# Altium PCB PCB.PcbDoc
Units mm, origin at the board's own origin, x right, y up, seen from the top; angles counter-clockwise.
Board outline 39.7 x 41.65 mm, 2 copper layers (Top Layer, Bottom Layer); 15 components, 9 nets, 36 pads, 146 vias.
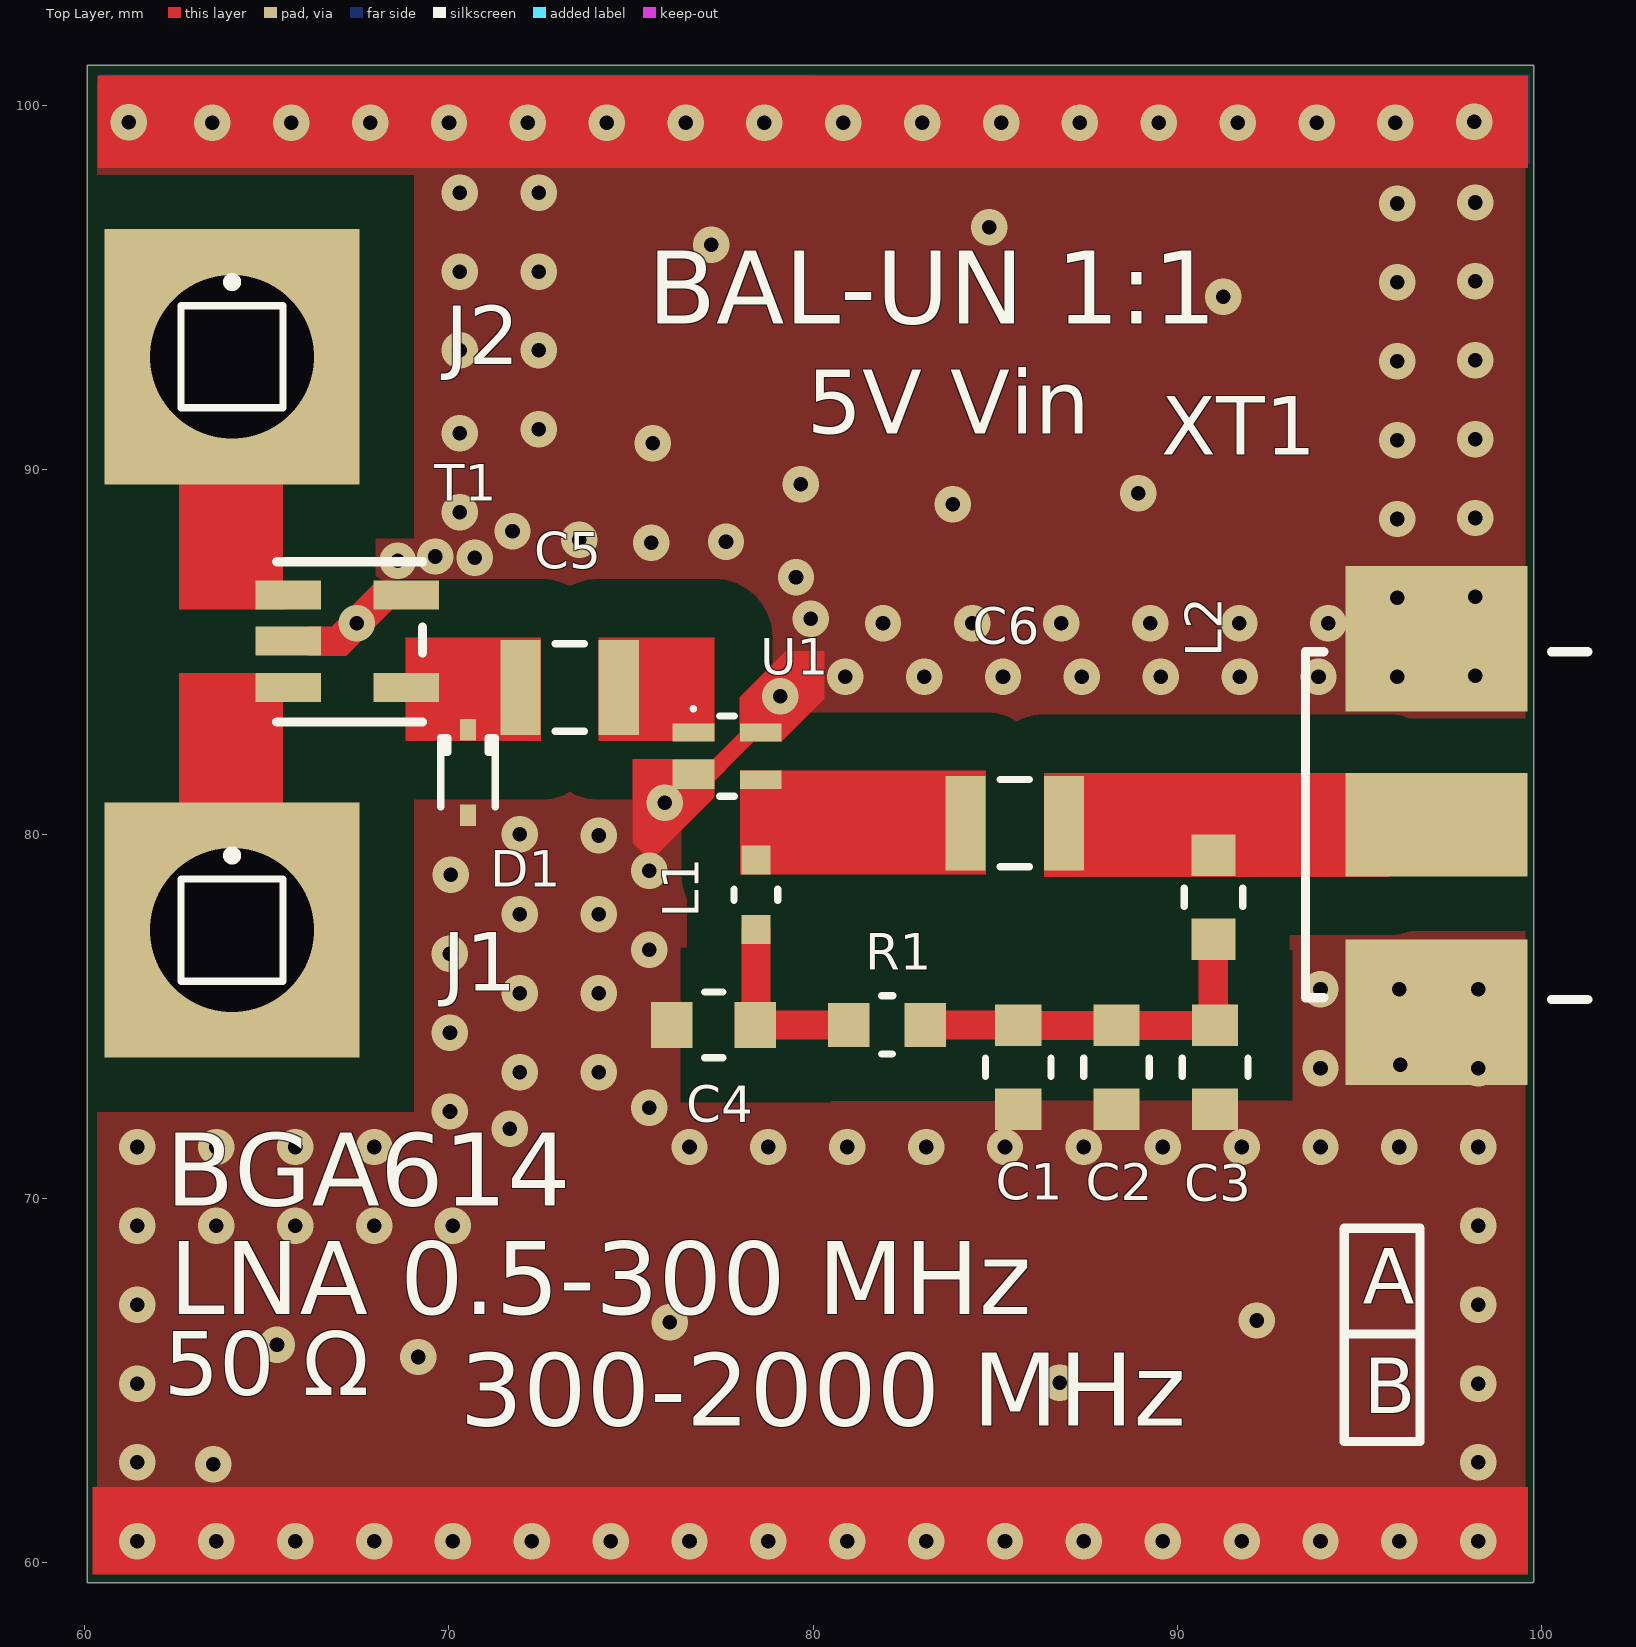
[diagram p0: Top Layer view]
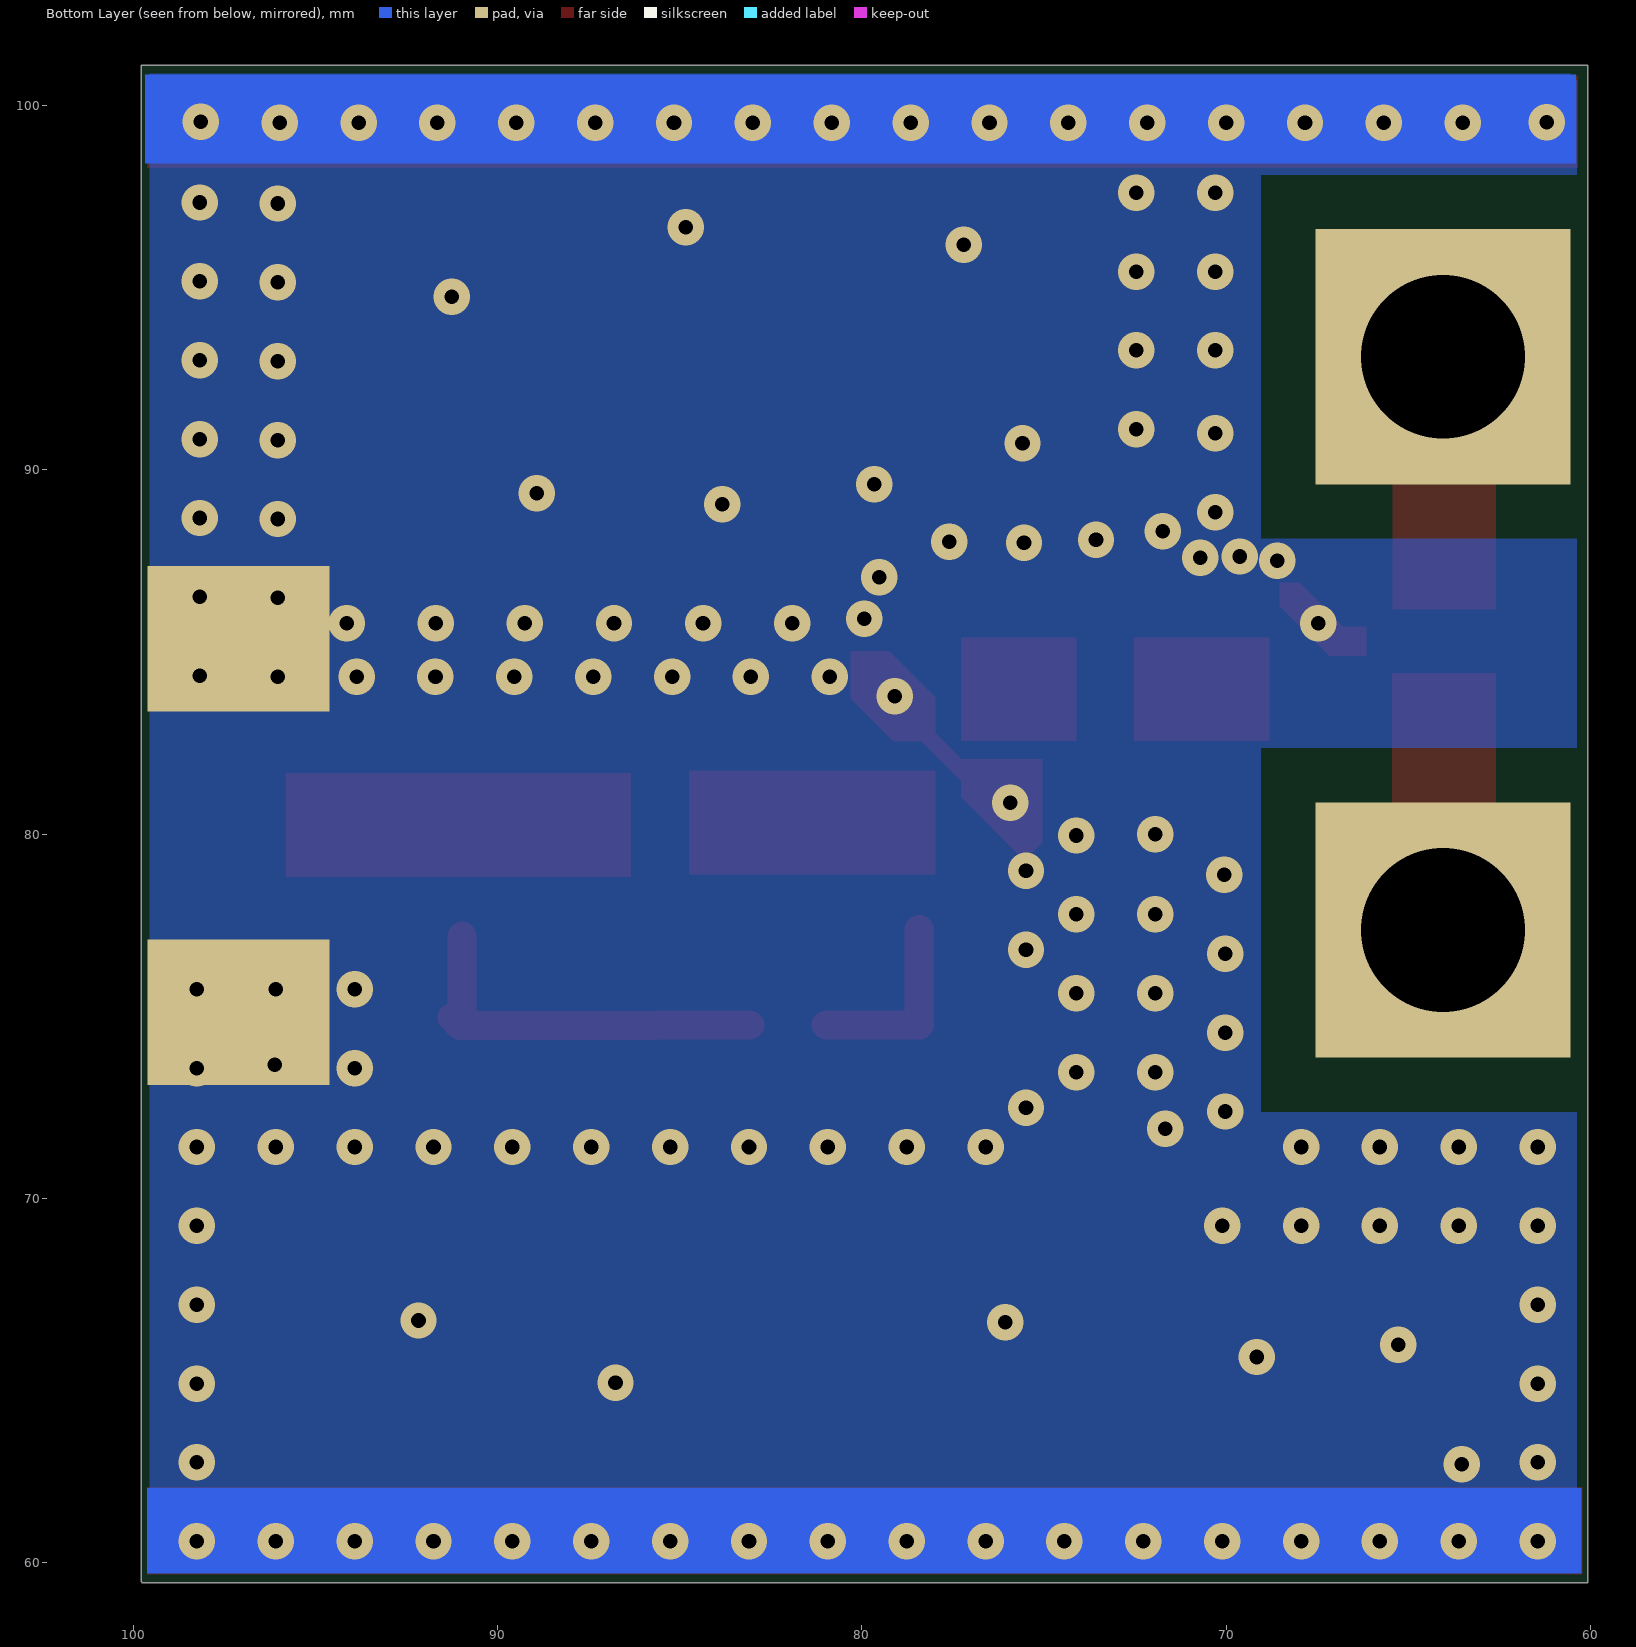
[diagram p1: Bottom Layer view, seen from below]
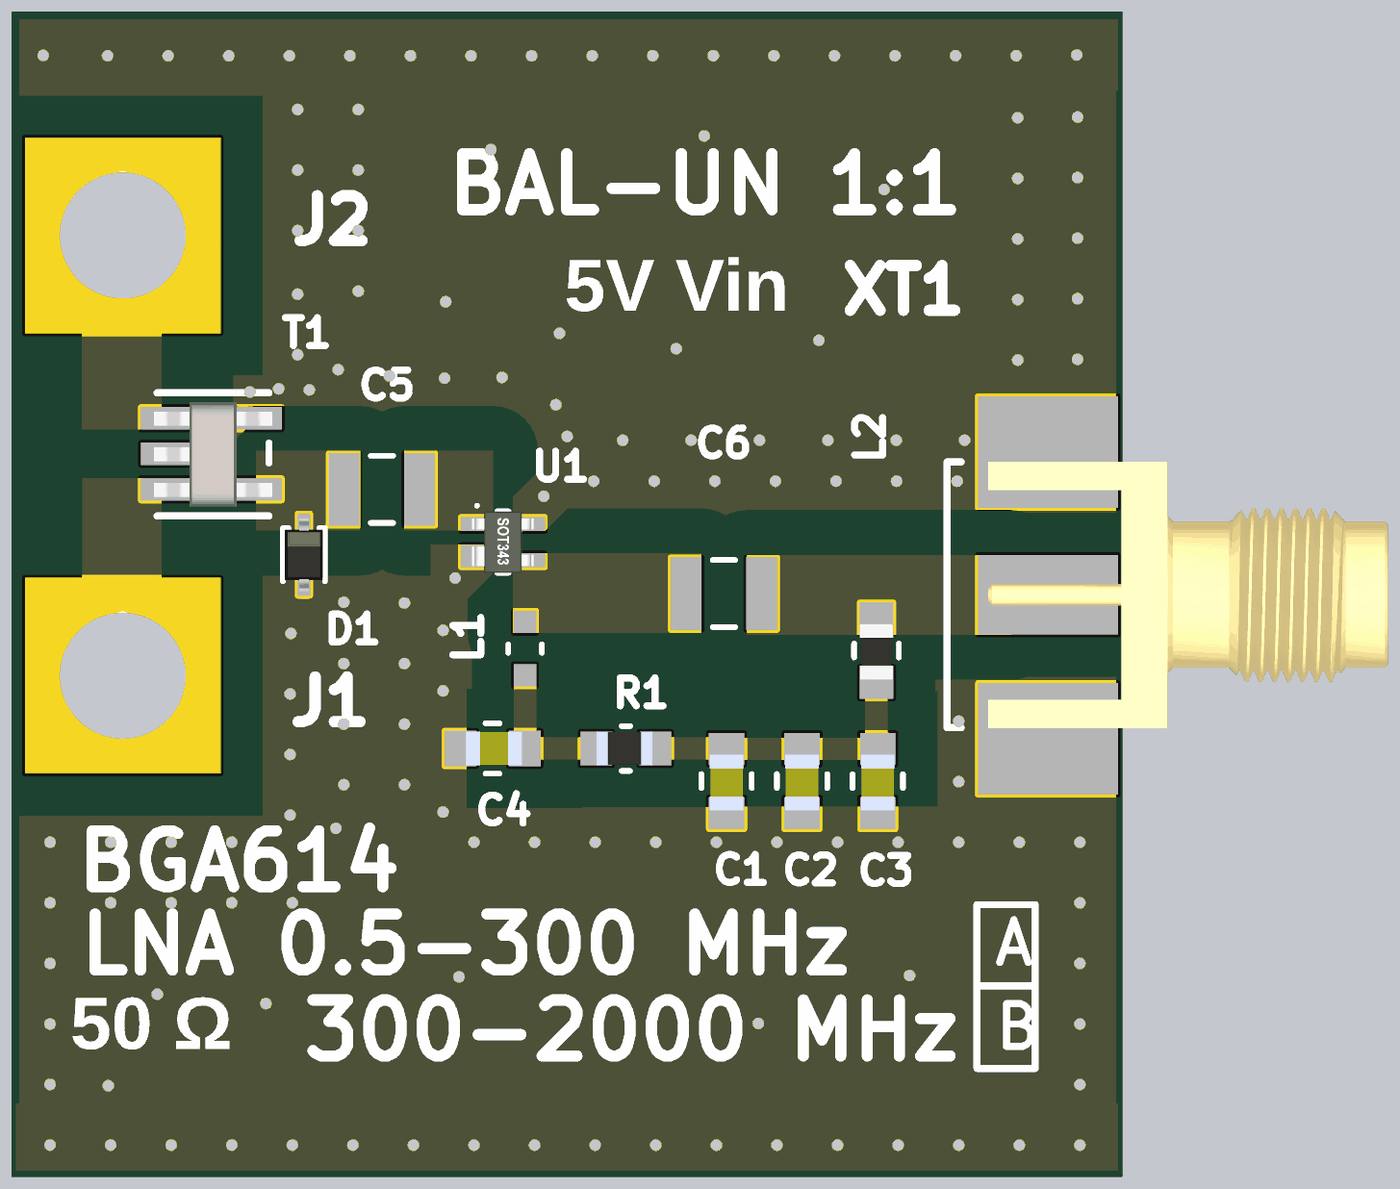
[diagram p2: 3D render of the assembled board from above, using the file's embedded part models]

## Layer stack, top to bottom
Top Solder: solder mask 0.0102, Solder Resist, Dk 3.5
Top Layer: signal copper 0.0356
Dielectric 1: dielectric 0.32, FR-4, Dk 4.8
Bottom Layer: signal copper 0.0356
Bottom Solder: solder mask 0.0102, Solder Resist, Dk 3.5

## Board outline
60.075,101.1 60.075,59.45 99.75,59.45 99.775,59.475 99.775,101.1

## Design rules (kind name [scope] priority, off if disabled: settings)
Clearance [All] p1: gap=0.4 ignorepadtopadclearanceinfootprint=TRUE except(1.5: SMDPad-Fill SMDPad-Poly SMDPad-Region THPad-Fill THPad-Poly THPad-Region; 1.6: Fill-Fill Fill-Poly Fill-Region Poly-Poly Poly-Region Region-Region)
PlaneConnect [All] p1: planeconnectstyle=Direct reliefexpansion=0.508 reliefentries=4 reliefconductorwidth=0.254 reliefairgap=0.254
PolygonConnect [All] p1: connectstyle=Direct reliefconductorwidth=0.254 reliefentries=4 polygonreliefangle="90 Angle" airgapwidth=0.254
RoomDefinition lna-balun [InComponentClass('lna-balun')] p1 off: confinementstyle=ConfineIn formatcopy=TRUE lockcomponents=FALSE outline 55.87,28.954 133.975,28.954 133.975,47.75 55.87,47.75
RoutingVias [All] p1: holewidth=0.4 width=1 viastyle="Through Hole" minholewidth=0.4 minwidth=1 maxholewidth=0.4 maxwidth=1
SolderMaskExpansion [All] p1: expansion=0.102
Width [All] p1: maxlimit=3 minlimit=0.4 preferedwidth=0.8 impedancedriven=TRUE minimp=50.000000 maximp=50.000000 favimp=50.000000
29 further rules are at their usual default settings.

## Components (designator, comment, footprint, x,y, rotation, side; value= is the part's Value field where it differs from the comment)
C1 "CAP_NPOL" C0805 88.326,74.549 r270 top value=100pF
C2 "CAP_NPOL" C0805 85.629,74.549 r270 top value=1nF
C3 "CAP_NPOL" C0805 91.031,74.547 r270 top value=10nF
C4 "CAP_NPOL" C0805 76.315,74.761 r0 top value=NC
C5 "CAP_NPOL" C1210 73.312,84.024 r0 top value=1nF
C6 "CAP_NPOL" C1210 85.534,80.299 r0 top value=1nF
D1 "NC" SOD-323 70.525,81.69 r90 top
J1 "A" PIN1 64.05,77.363 r0 top
J2 "B" PIN1 64.05,93.1 r0 top
L1 "IND_WO_IRON" IND0603 78.426,77.381 r90 top value=270nH
L2 "IND_W_IRON" IND0805 90.986,77.314 r90 top value=1uH
R1 "68" R0805 82.979,74.761 r180 top
T1 "TC4-1T" AT224 67.375,85.375 r90 top
U1 "BGA614" SOT-343 77.635,82.139 r0 top locked
XT1 "COAX-F" SMA-16 97.011,80.256 r180 top locked

## Footprints (in the part's own frame and the unit in brackets; to place one, negate y for a bottom-side part, rotate by r counter-clockwise, add the part's x,y. Pads: shape width x height; smd on the part's side, far side on the other; paste and mask are expansions set on the pad)
AT224 [mm] "Case style: AT224"
  rect 0.8x1.8 smd: 1(-1.35,1.78) 2(-0.08,1.78) 3(1.19,1.78) 4(1.19,-1.46) 6(-1.35,-1.46)
  silkscreen extent -2.3,-1.9 2.1,2.1, body extent -1.97,-2.01 1.77,2.22, height 3.55
C0805 [mm]
  rect 1.14x1.27 smd: 1(2.1,0) 2(-0.2,0)
  silkscreen extent 0.7,-0.9 1.2,0.9, body extent 0,-0.6 2,0.6, height 0.9
C1210 [mm] "Chip Capacitor, Body 3.2x2.5mm, IPC High Density"
  rect 1.1x2.6 smd: 1(-1.35,0) 2(1.35,0)
  silkscreen extent -0.4,-1.2 0.4,1.2, body extent -1.7,-1.35 1.7,1.35, height 1.3
IND0603 [mm]
  rect 0.8x0.8 smd: 1(1.905,0) 2(0,0)
  silkscreen extent 0.8,-0.6 1.1,0.6
IND0805 [mm]
  rect 1.14x1.2 smd: 1(2.1,0) 2(-0.2,0)
  silkscreen extent 0.7,-0.8 1.2,0.8, body extent -0.1,-0.6 1.9,0.6, height 0.95
PIN1 [mm] "Connector; Plug"
  rect 7x7 hole 4.5: 1(0,0)
  silkscreen extent -1.4,-1.4 1.4,2.17
R0805 [mm]
  rect 1.14x1.2 smd: 1(2,0) 2(-0.1,0)
  silkscreen extent 0.79,-0.8 1.1,0.8, body extent 0,-0.6 2,0.6, height 0.5
SMA-16 [mm] "Edge female socket SMA"
  rect 5x2.85 smd: 1(-0.1,0)
  rect 5x4 smd: 2(-0.1,5.15) 2(-0.1,-5.1)
  rect 5x4 smd far side: 2(-0.1,5.15) 2(-0.1,-5.1)
  silkscreen extent -4.25,-4.75 3.5,4.8, body extent -12.25,-4.76 2.03,4.76, height 4.32
SOD-323 [mm]
  rect 0.59x0.45 smd: 1(-1.175,0) 2(1.175,0)
  silkscreen extent -0.95,-0.75 0.95,0.75, body extent -1.3,-0.68 1.3,0.67, height 1.1
SOT-343 [mm] "SOT343, 4-Leads, Body 2x1.3 mm, Pitch 1.3mm, Lead Span 2.1mm, IPC Medium Density"
  rect 1.15x0.5 smd: 1(-0.925,0.65) 3(0.925,-0.65) 4(0.925,0.65)
  rect 1.15x0.8 smd: 2(-0.925,-0.5)
  silkscreen extent -0.97,-1.1 0.2,1.35, body extent -1.1,-1.1 1.1,1.1, height 1

## Part data
D1: library part TVS_BIDIR, "TVS Diodes"
J1 J2: library part Socket, "Socket", LatestRevisionDate=17-Jul-2002, LatestRevisionNote="Re-released for DXP Platform.", Publisher="Altium Limited"
R1: library part RESISTOR, "RES"
T1: "RF TRANSFORMERS WIDEBAND"
U1: "Silicon Germanium Broadband MMIC Amplifier"
XT1: "RF Coaxial PCB Connector, MCX; Thru-Hole, Right-Angle Mount Socket, Blunt Post Terminal, 50 Ohm Impedance", PackageDocument=04-Jul-1999, ComponentLink1Description="Manufacturer Link", ComponentLink1URL=http://www.amphenolrf.com/, DatasheetDocument=30-May-2003, DrillSize="Corresponds to nominal value.", LatestRevisionDate=15-Jul-2004, LatestRevisionNote="Component Replaced.", PackageReference=919-119J-51AX, PCB_Layout="Complies with manufacturer's recommendation.", Published=15-Jul-2004, Publisher="Altium Limited"

## Via types
v1: diameter 1, hole 0.4, Top Layer to Bottom Layer, tented both sides, 146 vias

## Nets (pads, with @x,y where several pads share a name; then routed paths per layer and width w, separated by ;. In a path a pad name is that pad's centre, name@x,y a point inside that pad or via, vN(x,y) a via of type N, cw(c..) or ccw(c..) an arc to the next point about the centre after c; other vN are vias at no path point)
A: J1.1 T1.1
B: J2.1 T1.3
GND: C1.1 C2.1 C3.1 C4.2 D1.1 T1.2 T1.4 U1.2 U1.4 XT1.2
  other v1: 61.452,60.586 63.617,60.586 65.781,60.586 67.946,60.586 70.111,60.586 72.276,60.586 74.44,60.586 76.605,60.586 78.77,60.586 80.935,60.586 83.099,60.586 85.264,60.586 87.429,60.586 89.594,60.586 91.758,60.586 93.923,60.586 96.088,60.586 98.253,60.586 63.533,62.706 61.452,62.751 98.253,62.751 61.452,64.915 86.763,64.934 98.253,64.915 69.164,65.646 65.282,65.979 76.066,66.598 92.169,66.647 61.452,67.08 98.253,67.08 61.452,69.245 63.617,69.245 65.781,69.245 67.946,69.245 70.111,69.245 98.253,69.245 61.452,71.41 63.617,71.41 65.781,71.41 67.946,71.41 76.605,71.41 78.77,71.41 80.935,71.41 83.099,71.41 85.264,71.41 87.429,71.41 89.594,71.41 91.758,71.41 93.923,71.41 96.088,71.41 98.253,71.41 71.669,71.906 70.03,72.384 75.496,72.492 71.951,73.466 74.116,73.466 93.923,73.574 98.253,73.574 96.112,73.669 70.03,74.549 71.951,75.631 74.116,75.631 93.923,75.739 96.088,75.739 98.253,75.739 70.03,76.713 75.496,76.822 71.951,77.796 74.116,77.796 70.057,78.878 75.496,78.986 74.116,79.96 71.951,79.988 75.929,80.853 79.095,83.776 80.881,84.317 83.045,84.317 85.21,84.317 87.375,84.317 89.54,84.317 91.704,84.317 93.869,84.317 96.034,84.317 98.171,84.344 81.916,85.78 84.36,85.78 86.804,85.78 89.248,85.78 91.692,85.78 94.136,85.78 67.476,85.79 79.933,85.914 96.034,86.482 98.171,86.509 79.528,87.05 68.595,87.505 70.716,87.581 69.624,87.618 75.55,87.997 77.606,88.024 73.574,88.078 71.747,88.306 96.034,88.647 98.171,88.674 70.3,88.836 83.83,89.052 88.927,89.353 79.657,89.6 75.591,90.728 96.034,90.811 98.171,90.838 70.3,91.001 72.465,91.109 96.034,92.976 98.171,93.003 70.3,93.274 72.465,93.274 91.26,94.743 96.034,95.141 98.171,95.168 70.3,95.438 72.465,95.438 77.204,96.171 84.831,96.656 96.034,97.306 98.171,97.333 70.3,97.603 72.465,97.603 63.508,99.524 65.673,99.524 67.838,99.524 70.003,99.524 72.167,99.524 74.332,99.524 76.497,99.524 78.662,99.524 80.826,99.524 82.991,99.524 85.156,99.524 87.321,99.524 89.485,99.524 91.65,99.524 93.815,99.524 95.98,99.524 61.208,99.537 98.144,99.551
IN: C5.1 D1.2 T1.6
NetC1_2: C1.2 C2.2 C3.2 L2.2 R1.2 | length 10.6
  Top Layer w0.8: R1.2 85.617,74.761 C2.2 85.631,74.747 C3.2 C3.2@91.244,74.96 ; C3.2@90.978,74.89 L2.2@90.978,77.195
NetC4_1: C4.1 L1.2 R1.1 | length 5.2
  Top Layer w0.8: L1.2 78.426,74.772 C4.1 R1.1
NetC5_2: C5.2 U1.1
NetC6_1: C6.1 L1.1 U1.3
OUT: C6.2 L2.1 XT1.1

## Polygon pours and split planes (outlines as drawn)
GND on Bottom Layer "Bottom-GND" (solid, remove dead copper, pour order 2): 60.375,100.887 60.375,59.75 99.55,59.75 99.55,100.862
GND on Top Layer "Top-GND" (solid, remove dead copper, pour order 0): 60.35,100.825 60.35,59.7 99.55,59.7 99.55,100.8

## Other copper
Top Layer:
  rectangle net NetC6_1: 77.984,78.889 84.739,81.739
  rectangle net GND: 60.35,98.275 99.625,100.825
  rectangle net GND: 60.225,59.675 99.625,62.075
  rectangle net OUT: 86.339,78.827 95.806,81.677
  region net A: 65.447,77.118 65.447,84.425 62.597,84.425 62.597,77.118
  region net B: 65.442,86.164 65.442,92.641 62.592,92.641 62.592,86.164
  rectangle net IN: 68.812,82.55 72.535,85.4
  rectangle net NetC5_2: 74.109,82.549 77.284,85.399
  region net GND: 77.278,82.038 77.261,82.055 75.048,82.055 75.048,79.763 75.541,79.27 77.278,81.007
  region net GND: 77.987,82.543 77.987,83.755 79.246,85.014 80.305,85.014 80.305,83.711 79.135,82.541
  region net GND: 77.261,82.055 78,82.794 78,82.9 78.449,82.9 78.561,82.788 78.561,82.542 78.367,82.542 76.825,81 76.8,81.025 76.8,81.925
  region net GND: 66.158,85.694 66.783,85.694 67.986,86.897 68.527,86.897 68.527,86.248 67.179,84.895 66.158,84.895
Bottom Layer:
  rectangle net GND: 60.4,98.4 99.675,100.85
  rectangle net GND: 60.25,59.7 99.625,62.05

## Silkscreen, mask and mechanical layers (free items; w line width, h text height)
Top Overlay:
  lines w0.254: 94.579,66.278 96.629,66.278 ; 94.579,63.328 96.654,63.328 96.654,69.178 94.579,69.178 94.579,63.328
  text "BAL-UN 1:1" at 75.464,94.001 h2
  text "5V Vin" at 79.829,90.406 h3
  text "BGA614" at 62.225,69.8 h2
  text "A" at 95.079,67.103 h1.52
  text "LNA 0.5-300 MHz" at 62.325,66.825 h2
  text "B" at 95.104,64.103 h1.52
  text "50 Ω" at 62.175,64.025 h3
  text "300-2000 MHz" at 70.3,63.752 h2
Mechanical 1:
  lines w0.254: 59.944,101.219 59.944,59.309 99.879,59.309 99.879,101.219 ; 59.95,101.225 99.875,101.225